# Altium PCB Arrow-ESC.PcbDoc (part 2 of 2)
Units mm, origin at the board's own origin, x right, y up, seen from the top; angles counter-clockwise.
Board outline 52 x 35 mm, 6 copper layers (Top Layer (SIG), Int1 (GND), Int2 (PWR), Int3 (SIG), Int4 (GND), Bottom Layer (SIG)), stack 1.481 mm thick; 87 components, 67 nets, 323 pads, 413 vias.
Unrouted connection lines stored in the file: 43.
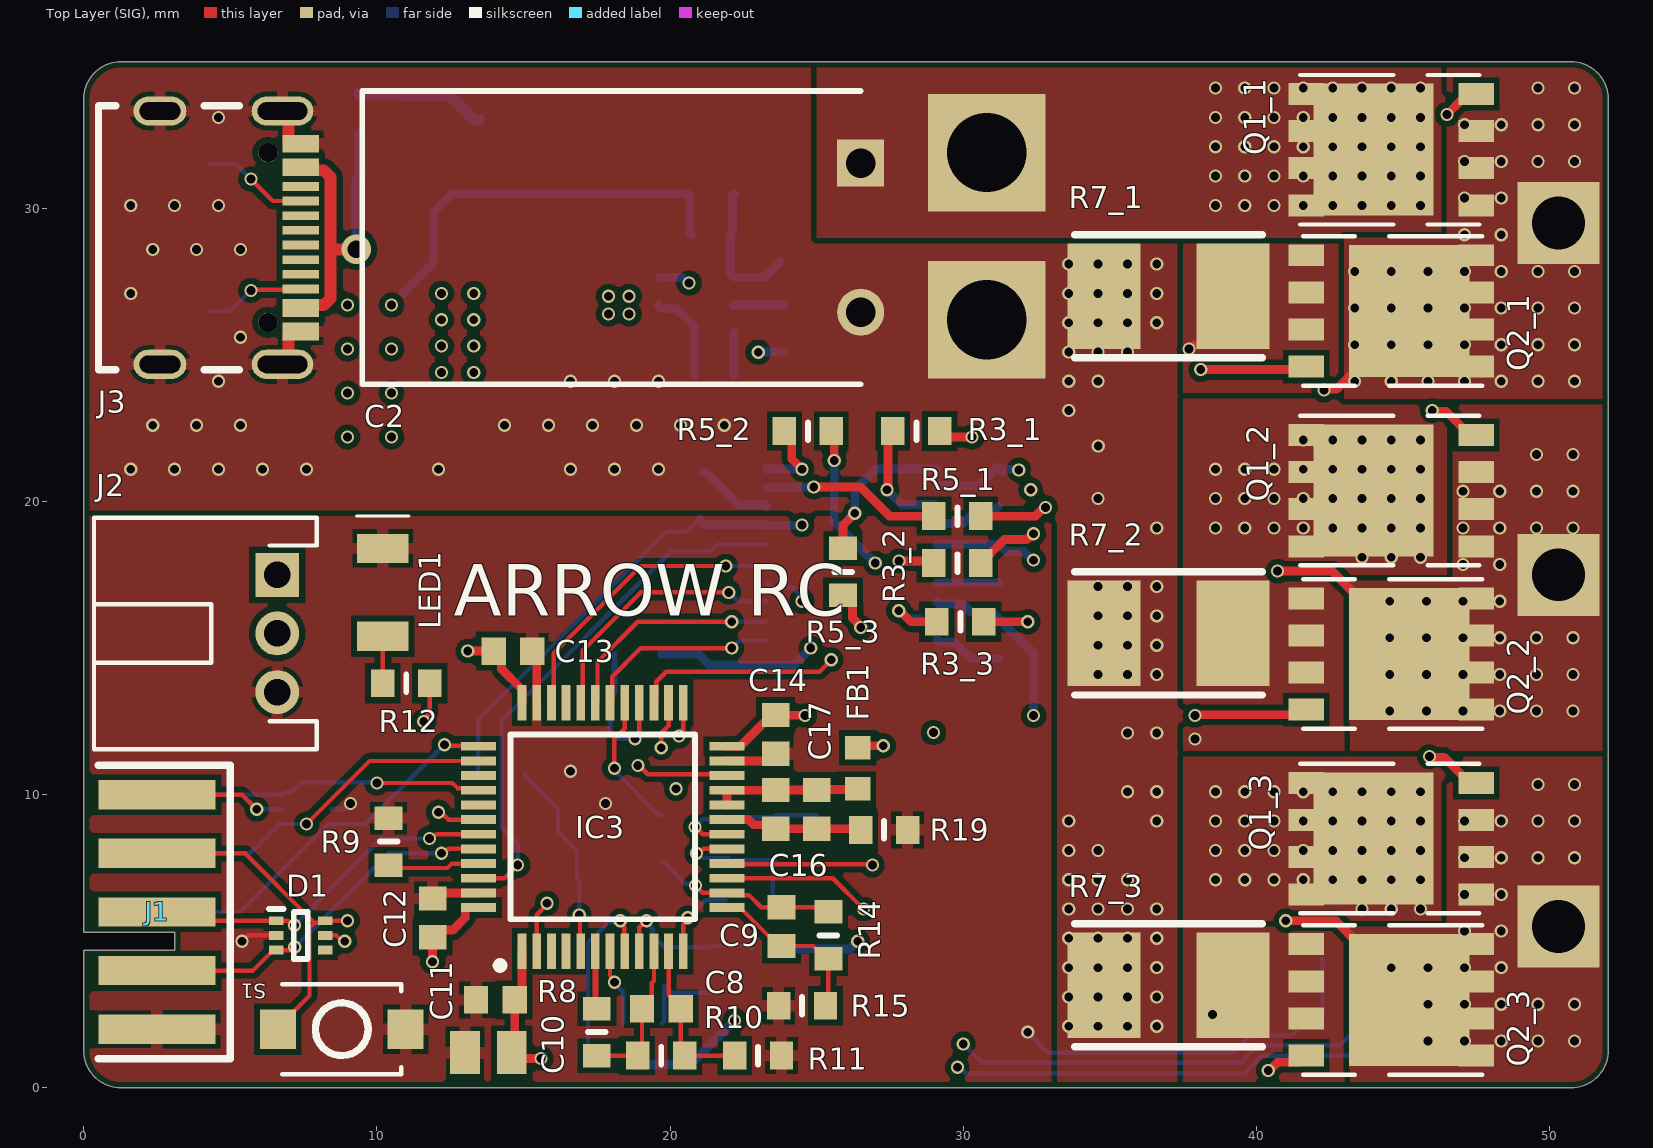
[diagram p0: Top Layer (SIG) view]

## Polygon pours and split planes (outlines as drawn) (continued)
OPAMP3_VINP on Top Layer (SIG) "NONET_L-01_P-001" (solid, pour order 33): 43,29 43,23.5 37.5,23.5 37.5,29
OPAMP1_VINP on Top Layer (SIG) "NONET_L-01_P-001" (solid, pour order 25): 43,5.5 37.5,5.5 37.5,0 43,0
NetC5_1_1 on Top Layer (SIG) "NONET_L-01_P-001" (solid, pour order 0): 43,23.5 52,23.5 52,33.73 ccw(c50.73,33.73) 50.73,35 46.5,35 46.5,29 43,29
VBATT on Top Layer (SIG) "NONET_L-01_P-001" (solid, pour order 16): 46.5,35 46.5,29 25,29 25,35
PGND on Top Layer (SIG) (solid, pour order 113): 33,0 37.5,0 37.5,29 25,29 25,35 15.5,35 1.27,35 ccw(c1.27,33.73) 0,33.73 0,19.5 33,19.5
OPAMP2_VINP on Top Layer (SIG) "NONET_L-01_P-001" (solid, pour order 10): 43,17.5 37.5,17.5 37.5,11.5 43,11.5
VBATT on Top Layer (SIG) "NONET_L-01_P-001" (solid, pour order 12): 46.5,23.5 37.5,23.5 37.5,17.5 46.5,17.5
VBATT on Top Layer (SIG) "NONET_L-01_P-001" (solid, pour order 56): 46.5,11.5 37.5,11.5 37.5,5.5 46.5,5.5
NetC5_3_1 on Top Layer (SIG) "NONET_L-01_P-001" (solid, pour order 53): 52,11.5 46.5,11.5 46.5,5.5 43,5.5 43,0 50.73,0 ccw(c50.73,1.27) 52,1.27
NetC5_2_1 on Top Layer (SIG) "NONET_L-01_P-001" (solid, pour order 47): 52,23.5 46.5,23.5 46.5,17.5 43,17.5 43,11.5 52,11.5
DGND on Int1 (GND) "NONET_L-01_P-001" (solid, pour order 108): 0,19.5 0,1.27 ccw(c1.27,1.27) 1.27,0 33,0 33,19.5
PGND on Int1 (GND) (solid, pour order 102): 33,0 43,0 43,5.5 46.5,5.5 46.5,11.5 43,11.5 43,17.5 46.5,17.5 46.5,23.5 43,23.5 43,29 25,29 25,35 15.5,35 1.27,35 ccw(c1.27,33.73) 0,33.73 0,19.5 33,19.5
VBATT on Int1 (GND) "NONET_L-01_P-001" (solid, pour order 72): 46.5,35 46.5,29 25,29 25,35
NetC5_1_1 on Int1 (GND) "NONET_L-01_P-001" (solid, pour order 52): 43,23.5 52,23.5 52,33.73 ccw(c50.73,33.73) 50.73,35 46.5,35 46.5,29 43,29
NetC5_3_1 on Int1 (GND) "NONET_L-01_P-001" (solid, pour order 60): 52,11.5 46.5,11.5 46.5,5.5 43,5.5 43,0 50.73,0 ccw(c50.73,1.27) 52,1.27
NetC5_2_1 on Int1 (GND) "NONET_L-01_P-001" (solid, pour order 42): 52,23.5 46.5,23.5 46.5,17.5 43,17.5 43,11.5 52,11.5
DGND on Int4 (GND) "NONET_L-01_P-001" (solid, pour order 106): 0,19.5 0,1.27 ccw(c1.27,1.27) 1.27,0 33,0 33,19.5
PGND on Int4 (GND) (solid, pour order 100): 33,0 43,0 43,5.5 46.5,5.5 46.5,11.5 43,11.5 43,17.5 46.5,17.5 46.5,23.5 43,23.5 43,29 25,29 25,35 15.5,35 1.27,35 ccw(c1.27,33.73) 0,33.73 0,19.5 33,19.5
VBATT on Int4 (GND) "NONET_L-01_P-001" (solid, pour order 71): 46.5,35 46.5,29 25,29 25,35
NetC5_1_1 on Int4 (GND) "NONET_L-01_P-001" (solid, pour order 39): 43,23.5 52,23.5 52,33.73 ccw(c50.73,33.73) 50.73,35 46.5,35 46.5,29 43,29
NetC5_3_1 on Int4 (GND) "NONET_L-01_P-001" (solid, pour order 48): 52,11.5 46.5,11.5 46.5,5.5 43,5.5 43,0 50.73,0 ccw(c50.73,1.27) 52,1.27
NetC5_2_1 on Int4 (GND) "NONET_L-01_P-001" (solid, pour order 44): 52,23.5 46.5,23.5 46.5,17.5 43,17.5 43,11.5 52,11.5
DGND on Int3 (SIG) "NONET_L-01_P-001" (solid, pour order 107): 0,19.5 0,1.27 ccw(c1.27,1.27) 1.27,0 33,0 33,19.5
PGND on Int3 (SIG) (solid, pour order 101): 33,0 43,0 43,5.5 46.5,5.5 46.5,11.5 43,11.5 43,17.5 46.5,17.5 46.5,23.5 43,23.5 43,29 25,29 25,35 15.5,35 1.27,35 ccw(c1.27,33.73) 0,33.73 0,19.5 33,19.5
NetC20_1 on Int3 (SIG) (solid, pour order 94): 11.5,23.9 14,23.9 19.1,25.7 19.1,27.7 11.5,27.7
VBATT on Int3 (SIG) "NONET_L-01_P-001" (solid, pour order 73): 46.5,35 46.5,29 25,29 25,35
NetC5_1_1 on Int3 (SIG) "NONET_L-01_P-001" (solid, pour order 40): 43,23.5 52,23.5 52,33.73 ccw(c50.73,33.73) 50.73,35 46.5,35 46.5,29 43,29
NetC5_3_1 on Int3 (SIG) "NONET_L-01_P-001" (solid, pour order 49): 52,11.5 46.5,11.5 46.5,5.5 43,5.5 43,0 50.73,0 ccw(c50.73,1.27) 52,1.27
NetC5_2_1 on Int3 (SIG) "NONET_L-01_P-001" (solid, pour order 45): 52,23.5 46.5,23.5 46.5,17.5 43,17.5 43,11.5 52,11.5
+3V3 on Int2 (PWR) "NONET_L-01_P-001" (solid, pour order 114): 25,35 1.27,35 ccw(c1.27,33.73) 0,33.73 0,1.27 ccw(c1.27,1.27) 1.27,0 33,0 33,19.5 25,19.5
VBATT on Int2 (PWR) "Int2 (PWR)-VBATT" (solid, pour order 62): 25,29 37.5,29 37.5,0 43,0 43,5.5 46.5,5.5 46.5,11.5 43,11.5 43,17.5 46.5,17.5 46.5,23.5 43,23.5 43,29 46.5,29 46.5,35 25,35
NetC20_1 on Int2 (PWR) (solid, pour order 112): 11.5,23.9 14,23.9 19.1,25.7 19.1,27.7 11.5,27.7
NetC5_1_1 on Int2 (PWR) "NONET_L-01_P-001" (solid, pour order 41): 43,23.5 52,23.5 52,33.73 ccw(c50.73,33.73) 50.73,35 46.5,35 46.5,29 43,29
PGND on Int2 (PWR) (solid, pour order 103): 33,0 37.5,0 37.5,29 25,29 25,19.5 33,19.5
NetC5_3_1 on Int2 (PWR) "NONET_L-01_P-001" (solid, pour order 51): 52,11.5 46.5,11.5 46.5,5.5 43,5.5 43,0 50.73,0 ccw(c50.73,1.27) 52,1.27
NetC5_2_1 on Int2 (PWR) "NONET_L-01_P-001" (solid, pour order 46): 52,23.5 46.5,23.5 46.5,17.5 43,17.5 43,11.5 52,11.5
PGND on Bottom Layer (SIG) (solid, pour order 98): 33,0 37.5,0 37.5,29 25,29 25,31.157 15.5,31.157 15.5,35 1.27,35 ccw(c1.27,33.73) 0,33.73 0,19.5 33,19.5
VBATT on Bottom Layer (SIG) (solid, pour order 89): 25,29 37.5,29 37.5,0 43,0 43,5.5 46.5,5.5 46.5,11.5 43,11.5 43,17.5 46.5,17.5 46.5,23.5 43,23.5 43,29 46.5,29 46.5,35 15.5,35 15.5,30.1 25,30.1
DGND on Bottom Layer (SIG) "NONET_L-01_P-001" (solid, pour order 105): 0,19.5 0,1.27 ccw(c1.27,1.27) 1.27,0 33,0 33,19.5
NetC5_3_1 on Bottom Layer (SIG) "NONET_L-01_P-001" (solid, pour order 78): 52,11.5 46.5,11.5 46.5,5.5 43,5.5 43,0 50.73,0 ccw(c50.73,1.27) 52,1.27
NetC5_1_1 on Bottom Layer (SIG) "NONET_L-01_P-001" (solid, pour order 80): 43,23.5 52,23.5 52,33.73 ccw(c50.73,33.73) 50.73,35 46.5,35 46.5,29 43,29
NetC21_2 on Bottom Layer (SIG) "NONET_L-01_P-001" (solid, pour order 77): 20.4,27.3 17.6,27.3 17.6,26.3 14,26.3 14,27.7 12.2,27.7 12.2,30.1 20.4,30.1 20.4,28
NetC20_1 on Bottom Layer (SIG) "NONET_L-01_P-001" (solid, pour order 75): 20.4,27.3 20.4,26.1 17.6,26.1 17.6,27.3
+3V3 on Bottom Layer (SIG) "NONET_L-01_P-001" (solid, pour order 38): 11.5,27.7 8.1,27.7 8.1,21.5 11.5,21.5
NetC20_1 on Bottom Layer (SIG) "NONET_L-01_P-001" (solid, pour order 43): 14,27.7 11.5,27.7 11.5,23.9 14,23.9
NetC5_2_1 on Bottom Layer (SIG) "NONET_L-01_P-001" (solid, pour order 82): 52,23.5 46.5,23.5 46.5,17.5 43,17.5 43,11.5 52,11.5

## Silkscreen, mask and mechanical layers (free items; w line width, h text height)
Top Overlay:
  text "ARROW RC" at 12.614,15.532 h3
Mechanical 13:
  lines w0.2: 0,4.7 0,1.27 ccw(c1.27,1.27) 1.27,0 2,0 50.73,0 ccw(c50.73,1.27) 52,1.27 52,33.73 ccw(c50.73,33.73) 50.73,35 50,35 ; 0,5.3 0,33 0,33.73 cw(c1.27,33.73) 1.27,35 50,35 ; 50,35 ccw(c50,35) 50,35